# EAGLE board sma_board_wvia (EAGLE 7.7.0)
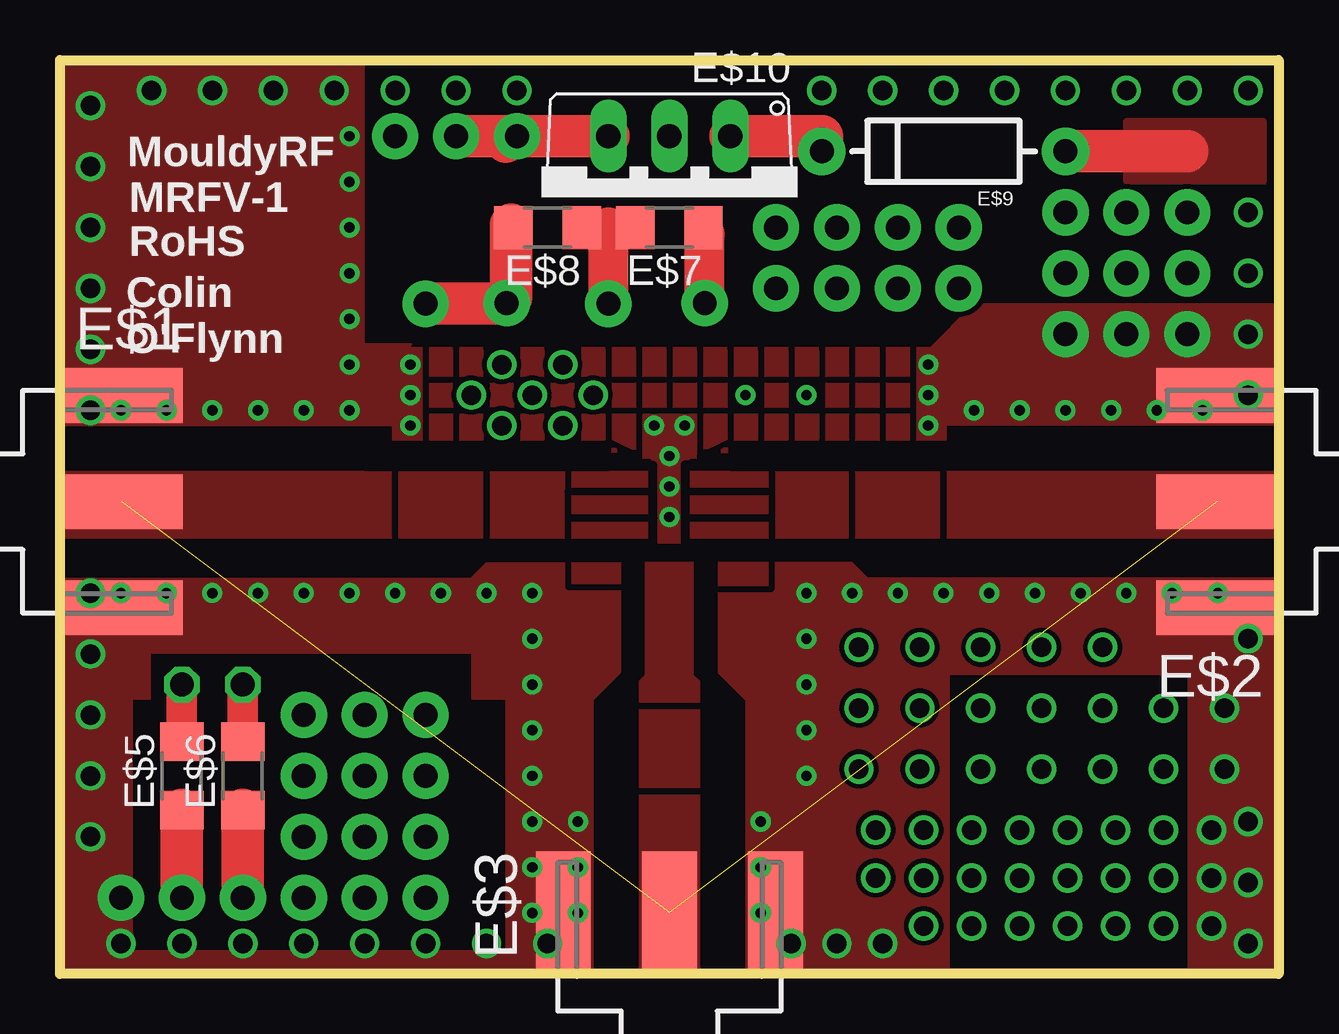
[diagram p0: board, top side]
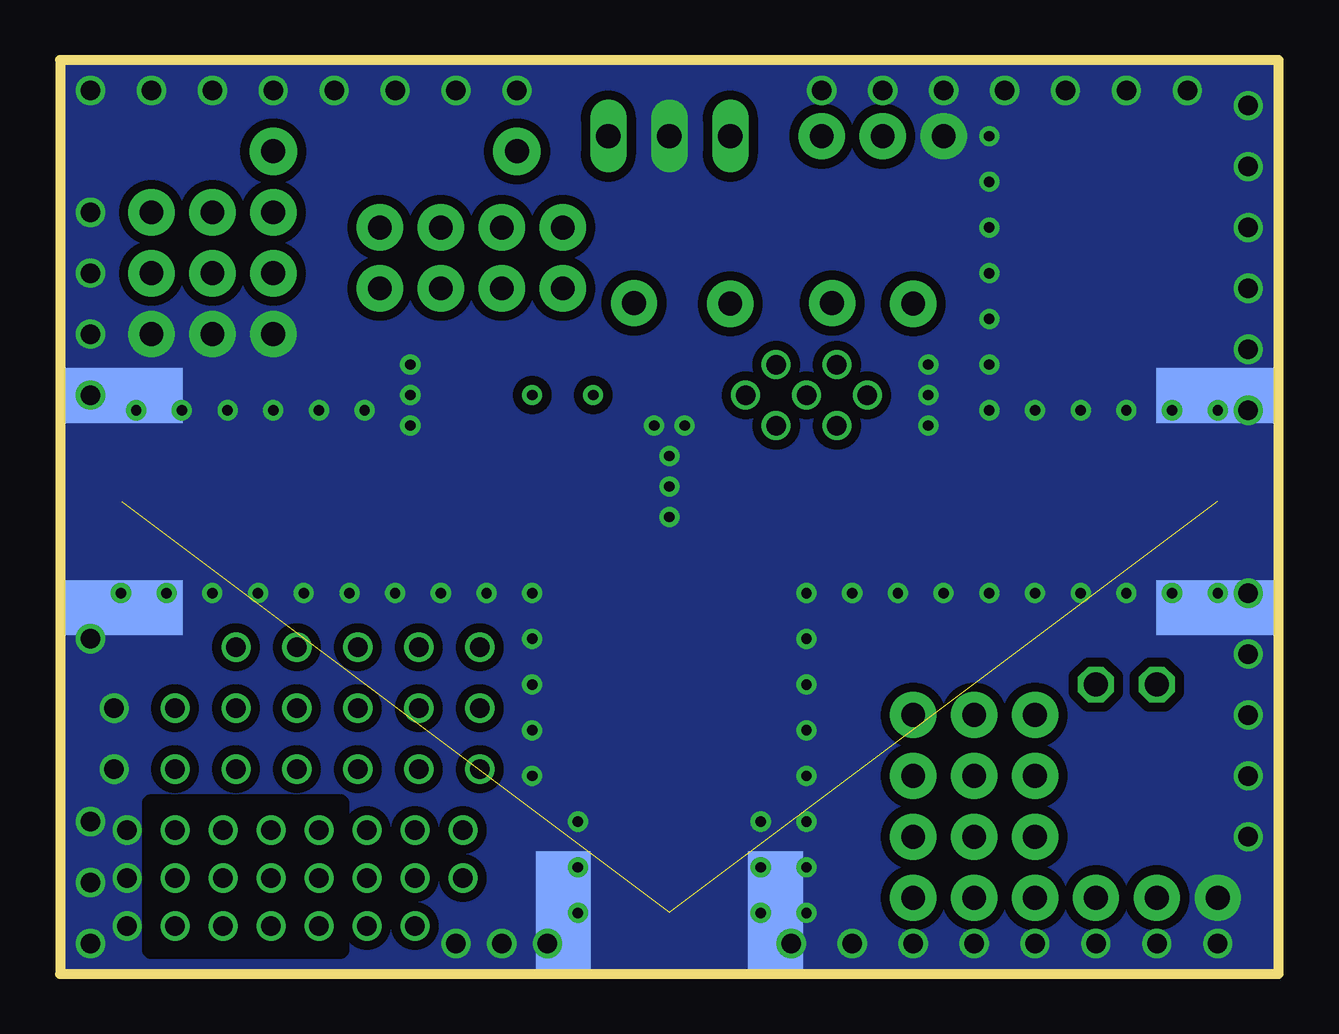
[diagram p1: board, bottom side, seen from below]

Size 50.8 x 38.1 mm. Coordinates in mm from the lower left corner, seen from the top.
Outline: 0,0 0,38.1 50.8,38.1 50.8,0 0,0
Copper layers (1*16): Top 0.035mm / dielectric 1.5mm / Bottom 0.035mm
Design rules "default *": minimum track width 10mil, minimum drill 24mil, track to track 8mil, track to pad 8mil, pad to pad 8mil, via to via 8mil, smd to smd 8mil, copper to edge 0mil, drill to drill 8mil, minimum pad ring 10mil, minimum via ring 8mil, stop-mask expansion 4mil, vias tented up to drill 0mil, thermal gap 10mil
tRestrict: area 12.7,21 to 22.9,22.2; area 27.9,21 to 36.8,22.2; area 3.8,10.8 to 17.1,13.3; area 37.1,0.3 to 47,12.4; area 3,1 to 18.5,11.4; 50 lines
bRestrict: area 39.1,1 to 47,7.1

## Footprints (pad centres in the part's own frame; a part is rotated, then mirrored left to right if it is on the bottom)
J502-ND-142-0701-801/806 = smd 5.08 x 2.286: 1 2.565,0; G@1 2.565,4.42; G@2 2.565,-4.42 | smd 5.08 x 2.286 bottom: G@3 2.565,4.42; G@4 2.565,-4.42
R1206 = smd 1.6 x 1.803: 1 -1.422,0; 2 1.422,0
DIODE-1N4001 = drill 1 pad 1.981: A -5.08,0; C 5.08,0
TO220V = drill 1.016 long: 1 -2.54,-2.54; 2 0,-2.54; 3 2.54,-2.54

## Placement (x,y rotation side)
DRILEGEND  [DRILEGEND]  -41.34,-13.64 0 top  (outside the outline)
E$1  [J502-ND-142-0701-801/806]  0,19.68 0 top
E$2  [J502-ND-142-0701-801/806]  50.8,19.68 180 top
E$3  [J502-ND-142-0701-801/806]  25.4,0 90 top
E$5  [R1206]  5.08,8.26 90 top
E$6  [R1206]  7.62,8.26 90 top
E$7  [R1206]  25.4,31.11 180 top
E$8  [R1206]  20.32,31.11 180 top
E$9  [DIODE-1N4001]  36.83,34.29 180 top
E$10  [TO220V]  25.4,32.38 180 top

## Library data of the parts
DRILEGEND = drilegend
E$1-E$3 = con-coax
E$5-E$8 = adafruit
E$9 = SparkFun
E$10 = linear

## Nets
GND: E$1.G@1 E$1.G@2 E$1.G@3 E$1.G@4 E$2.G@1 E$2.G@2 E$2.G@3 E$2.G@4 E$3.G@1 E$3.G@2 E$3.G@3 E$3.G@4 E$10.2
LINE: E$1.1 E$2.1 E$3.1
S$2: E$5.1
S$3: E$6.1
S$8: E$9.C E$10.1
S$23: E$10.3
VCC: E$9.A

## Tracks (layer width: path | path; a pad name or v marks a point on that pad's centre or on a via)
GND  (via drill 0.43, 0.81, 0.99 pad 1.93)
  other vias: 17.78,15.88 15.88,15.88 13.97,15.88 12.06,15.88 10.16,15.88 8.26,15.88 6.35,15.88 19.68,13.97 19.68,12.06 19.68,10.16 19.68,8.26 21.59,6.35 31.11,13.97 31.11,12.06 31.11,10.16 31.11,8.26 29.21,6.35 31.11,15.88 34.92,15.88 36.83,15.88 38.73,15.88 40.64,15.88 42.55,15.88 44.45,15.88 12.06,23.5 10.16,23.5 8.26,23.5 6.35,23.5 12.06,25.4 12.06,27.3 12.06,29.21 12.06,31.11 12.06,33.02 12.06,34.92 4.45,23.5 2.54,23.5 4.45,15.88 2.54,15.88 20.32,1.27 21.59,2.54 21.59,4.45 46.35,15.88 48.26,15.88 29.21,4.45 29.21,2.54 30.48,1.27 32.38,1.27 13.97,34.92 41.91,26.67 44.45,26.67 46.99,26.67 36.2,24.13 36.2,22.86 14.61,22.86 14.61,24.13 14.61,25.4 36.2,25.4 24.77,22.86 26.04,22.86 19.68,15.88 33.02,15.88 48,2 48,4 48,6 19.68,6.35 19.68,4.45 19.68,2.54 48.54,11.08 48.54,8.54 38.1,23.5 40.01,23.5 41.91,23.5 43.81,23.5 45.72,23.5 47.62,23.5 2.54,3.17 1.27,23.5 12.7,1.27 10.16,1.27 15.24,1.27 17.78,1.27 7.62,1.27 5.08,1.27 2.54,1.27 1.27,5.71 1.27,8.26 1.27,10.79 1.27,13.34 1.27,15.88 1.27,26.04 1.27,28.57 1.27,31.11 1.27,33.66 1.27,36.2 3.81,36.83 6.35,36.83 8.89,36.83 11.43,36.83 13.97,36.83 16.51,36.83 19.05,36.83 31.75,36.83 34.29,36.83 36.83,36.83 39.37,36.83 41.91,36.83 44.45,36.83 46.99,36.83 49.53,36.83 49.53,31.75 49.53,29.21 49.53,26.67 49.53,24.13 49.53,13.97 49.53,6.35 49.53,3.81 49.53,1.27 34.29,1.27 25.4,21.59 25.4,20.32 25.4,19.05
  pour Top (rank 2, no thermals): 0.64,22.86 12.7,22.86 12.7,38.1 0,38.1 0,22.86
  pour Top (rank 2, no thermals): 0,16.51 17.14,16.51 17.78,17.14 23.37,17.14 23.37,12.57 22.23,11.43 22.23,0 0,0
  pour Top (rank 2, no thermals): 50.8,16.51 33.66,16.51 33.02,17.14 27.43,17.14 27.43,12.57 28.57,11.43 28.57,0 50.8,0
  pour Bottom (isolate 0.381, rank 2, no thermals): 0,38.1 50.8,38.1 50.8,0 0,0
  pour Top (rank 2, no thermals): 13.97,26.04 36.83,26.04 36.83,21.59 13.97,21.59
  pour Top (rank 2, no thermals): 10.16,22.86 14.61,22.86 14.61,26.19 14.68,26.26 11.66,26.26 10.79,25.4 10.79,23.5
  pour Top (rank 2, no thermals): 36.2,26.04 38.1,27.94 50.8,27.94 50.8,22.86 36.2,22.86
  pour Top: 24.92,18.16 25.86,18.16 25.86,21.34 26.37,21.84 24.54,21.84 24.49,21.89 24.49,21.87 24.97,21.39 24.97,18.19
LINE  (2 unrouted)
  pour Top (rank 2, no thermals): 0,20.95 50.8,20.95 50.8,18.16 0,18.16
  pour Top (rank 2, no thermals): 24.13,0 26.67,0 26.67,12.19 26.42,12.45 26.42,17.14 24.38,17.14 24.38,12.45 24.13,12.19
S$1  (via drill 0.99 pad 1.93)
  Top 1.778: 18.8,31.24 18.8,28.19 18.54,27.94 v15.24,27.94
S$2
  Top 1.778: 5.08,3.17 E$5.1
S$3
  Top 1.778: 7.62,3.17 E$6.1
S$4  (via drill 0.99)
  Top 1.27: 5.08,9.53 v5.08,12.06
S$5  (via drill 0.99)
  Top 1.27: 7.62,9.53 v7.62,12.06
S$6  (via drill 0.99 pad 1.93)
  other vias: 5.08,3.17
S$7  (via drill 0.99 pad 1.93)
  other vias: 34.92,28.57
S$8
  Top 1.778: E$10.1 31.75,34.92 E$9.C
S$9  (via drill 0.99 pad 1.93)
  other vias: 41.91,31.75
S$10  (via drill 0.99 pad 1.93)
  other vias: 41.91,29.21
S$11
  Top 1.676: 22.02,31.09 23.47,31.09 23.5,31.11
S$12  (via drill 0.99 pad 1.93)
  other vias: 44.45,31.75
S$13  (via drill 0.99 pad 1.93)
  other vias: 44.45,29.21
S$14  (via drill 0.99 pad 1.93)
  other vias: 46.99,29.21
S$15  (via drill 0.99 pad 1.93)
  other vias: 46.99,31.75
S$16  (via drill 0.99 pad 1.93)
  other vias: 7.62,3.17
S$17  (via drill 0.99 pad 1.93)
  other vias: 10.16,3.17
S$18  (via drill 0.99 pad 1.93)
  other vias: 10.16,5.71
S$19  (via drill 0.99 pad 1.93)
  other vias: 10.16,8.26
S$20  (via drill 0.99 pad 1.93)
  other vias: 15.24,3.17
S$21  (via drill 0.99 pad 1.93)
  other vias: 12.7,8.26
S$22  (via drill 0.99 pad 1.93)
  other vias: 10.16,10.79
S$23  (via drill 0.99 pad 1.93)
  Top 1.778: E$10.3 v19.05,34.92 v16.51,34.92
S$24  (via drill 0.99 pad 1.93)
  other vias: 26.87,27.97
S$25
  Top 1.676: 18.59,34.65 18.82,34.87
S$26  (via drill 0.99 pad 1.93)
  Top 1.676: v22.86,27.94 22.86,31.11
S$27
  Top 1.676: 26.87,27.94 26.87,30.84 26.85,30.86
S$28  (via drill 0.99 pad 1.93)
  other vias: 18.62,27.97
S$29  (via drill 0.99 pad 1.93)
  other vias: 12.7,10.79
S$30  (via drill 0.99 pad 1.93)
  other vias: 29.84,31.11
S$31  (via drill 0.99 pad 1.93)
  other vias: 32.38,31.11
S$32  (via drill 0.99 pad 1.93)
  other vias: 37.47,31.11
S$33  (via drill 0.81)
  other vias: 20.95,25.4
S$34  (via drill 0.81)
  other vias: 18.41,25.4
S$35  (via drill 0.81)
  other vias: 19.68,24.13
S$36  (via drill 0.81)
  other vias: 17.14,24.13
S$37  (via drill 0.81)
  other vias: 22.23,24.13
S$38  (via drill 0.81)
  other vias: 20.95,22.86
S$39  (via drill 0.81)
  other vias: 18.41,22.86
S$40  (via drill 0.81)
  other vias: 46,2
S$41  (via drill 0.81)
  other vias: 44,2
S$42  (via drill 0.81)
  other vias: 42,2
S$43  (via drill 0.81)
  other vias: 40,2
S$44  (via drill 0.81)
  other vias: 38,2
S$45  (via drill 0.81)
  other vias: 36,2
S$46  (via drill 0.81)
  other vias: 36,4
S$47  (via drill 0.81)
  other vias: 38,4
S$48  (via drill 0.81)
  other vias: 40,4
S$49  (via drill 0.81)
  other vias: 42,4
S$50  (via drill 0.81)
  other vias: 44,4
S$51  (via drill 0.81)
  other vias: 46,4
S$52  (via drill 0.81)
  other vias: 43.46,11.08
S$53  (via drill 0.81)
  other vias: 35.84,8.54
S$54  (via drill 0.99 pad 1.93)
  other vias: 15.24,10.79
S$55  (via drill 0.81)
  other vias: 46,11.08
S$56  (via drill 0.81)
  other vias: 44,6
S$57  (via drill 0.99 pad 1.93)
  other vias: 15.24,8.26
S$58  (via drill 0.81)
  other vias: 46,8.54
S$59  (via drill 0.81)
  other vias: 42,6
S$60  (via drill 0.81)
  other vias: 46,6
S$61  (via drill 0.81)
  other vias: 40,6
S$62  (via drill 0.81)
  other vias: 43.46,8.54
S$63  (via drill 0.81)
  other vias: 38,6
S$64  (via drill 0.81)
  other vias: 40.92,8.54
S$65  (via drill 0.81)
  other vias: 36,6
S$66  (via drill 0.81)
  other vias: 38.38,8.54
S$67  (via drill 0.81)
  other vias: 33.3,8.54
S$68  (via drill 0.81)
  other vias: 33.3,11.08
S$69  (via drill 0.81)
  other vias: 35.84,11.08
S$70  (via drill 0.81)
  other vias: 38.38,11.08
S$71  (via drill 0.81)
  other vias: 40.92,11.08
S$72  (via drill 0.81)
  other vias: 43.46,13.62
S$73  (via drill 0.81)
  other vias: 40.92,13.62
S$74  (via drill 0.81)
  other vias: 38.38,13.62
S$75  (via drill 0.81)
  other vias: 33.3,13.62
S$76  (via drill 0.81)
  other vias: 34,6
S$77  (via drill 0.81)
  other vias: 34,4
S$78  (via drill 0.99 pad 1.93)
  other vias: 12.7,5.71
S$79  (via drill 0.99 pad 1.93)
  other vias: 15.24,5.71
S$80  (via drill 0.99 pad 1.93)
  other vias: 12.7,3.17
S$81  (via drill 0.99 pad 1.93)
  other vias: 37.47,28.57
S$82  (via drill 0.99 pad 1.93)
  other vias: 34.92,31.11
S$83  (via drill 0.99 pad 1.93)
  other vias: 32.38,28.57
S$84  (via drill 0.99 pad 1.93)
  other vias: 29.84,28.57
S$85  (via drill 0.43)
  other vias: 31.11,24.13
S$86  (via drill 0.43)
  other vias: 28.57,24.13
TEST  (via drill 0.81)
  other vias: 35.84,13.62
VCC
  Top 1.778: E$9.A 46.99,34.29
  pour Top: 44.45,35.56 50.16,35.56 50.16,33.02 44.45,33.02

## Text on the board
tPlace: MouldyRF | MRFV-1 | RoHS | Colin / O'Flynn
instructions: Place Any Required Markings in This Area | On bottom side | Board Stackup | TOP COPPER (1 Oz) | FR4 Material (0.062") | BOTTOM COPPER (1 Oz)